# Altium PCB racer.PcbDoc (part 1 of 2)
Units mm, origin at the board's own origin, x right, y up, seen from the top; angles counter-clockwise.
Board outline 64 x 85 mm, 4 copper layers (Top Layer, Ground Plane, Power Plane, Bottom Layer), stack 0.844 mm thick; 123 components, 70 nets, 323 pads, 48 vias.
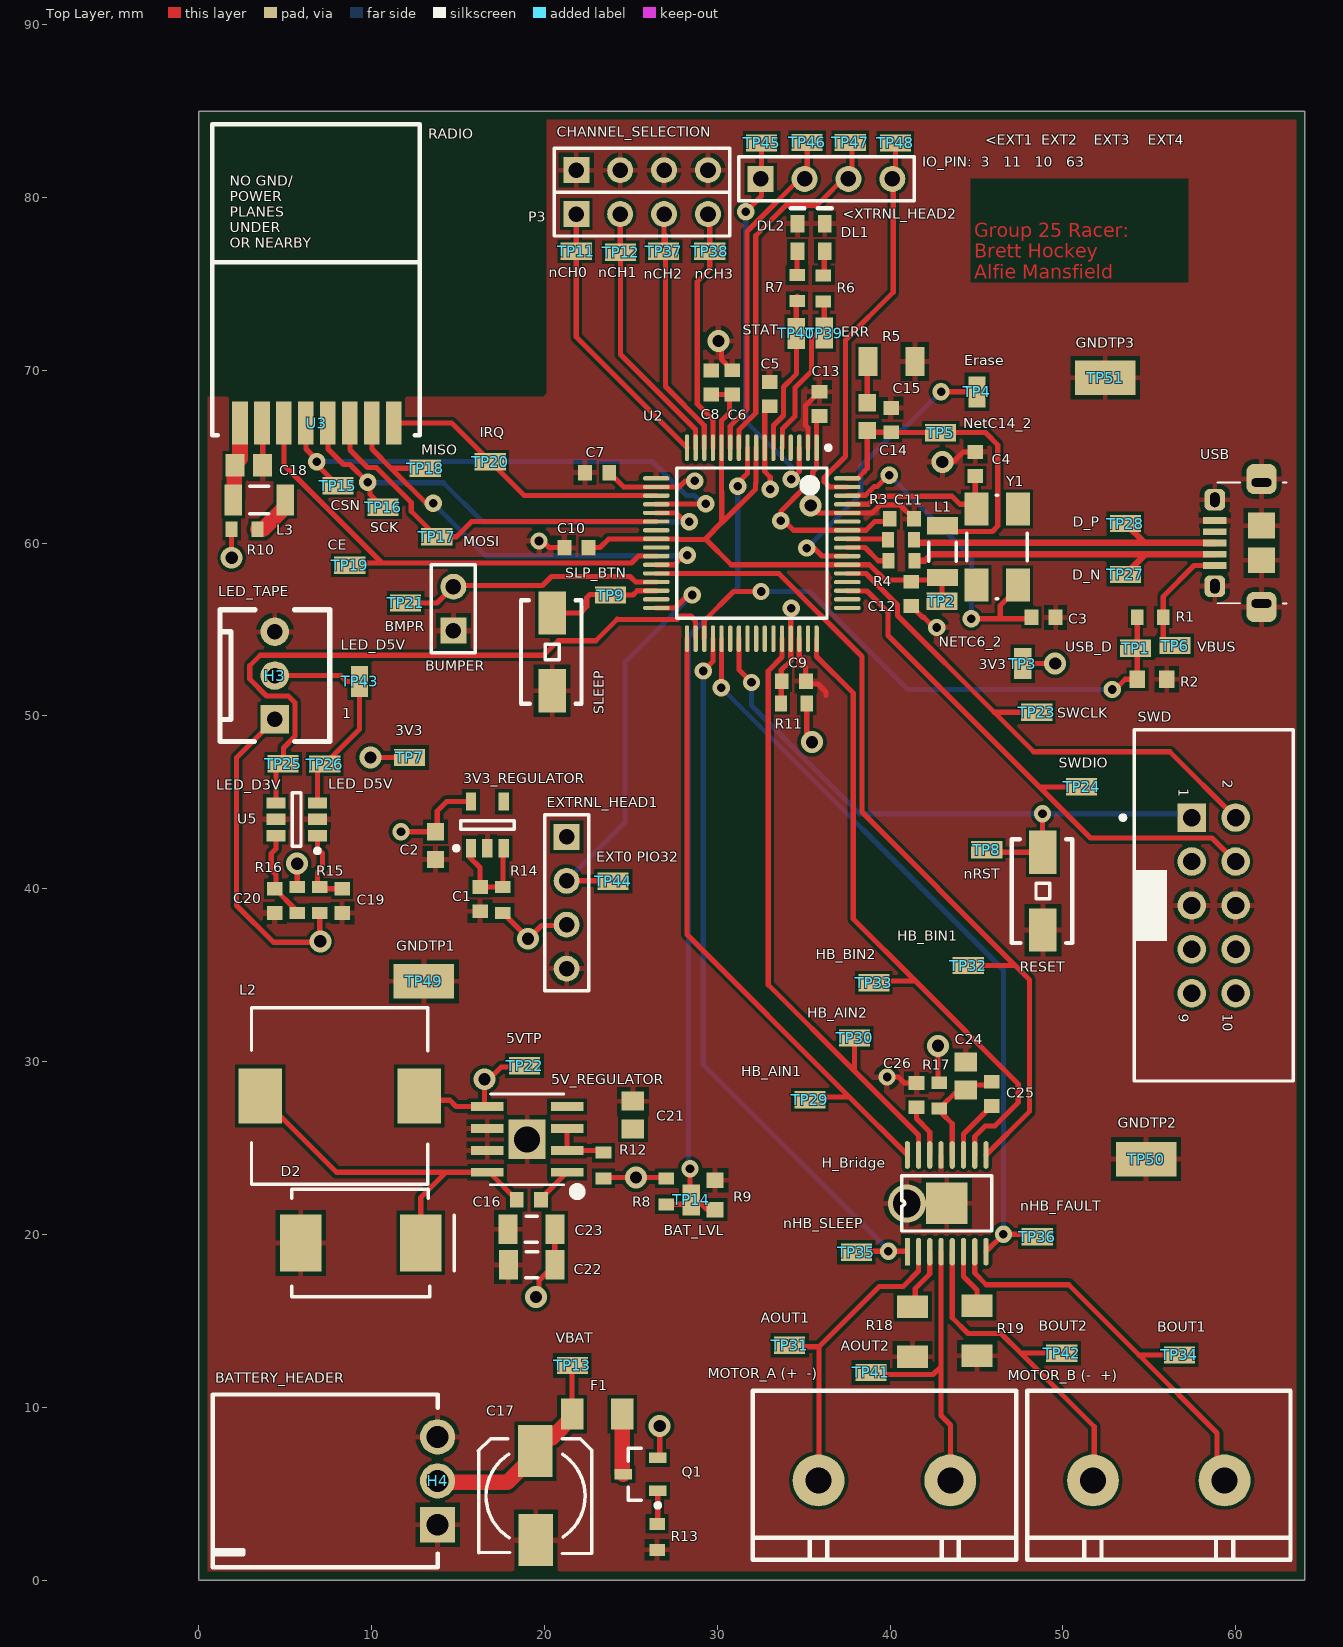
[diagram p0: Top Layer view]
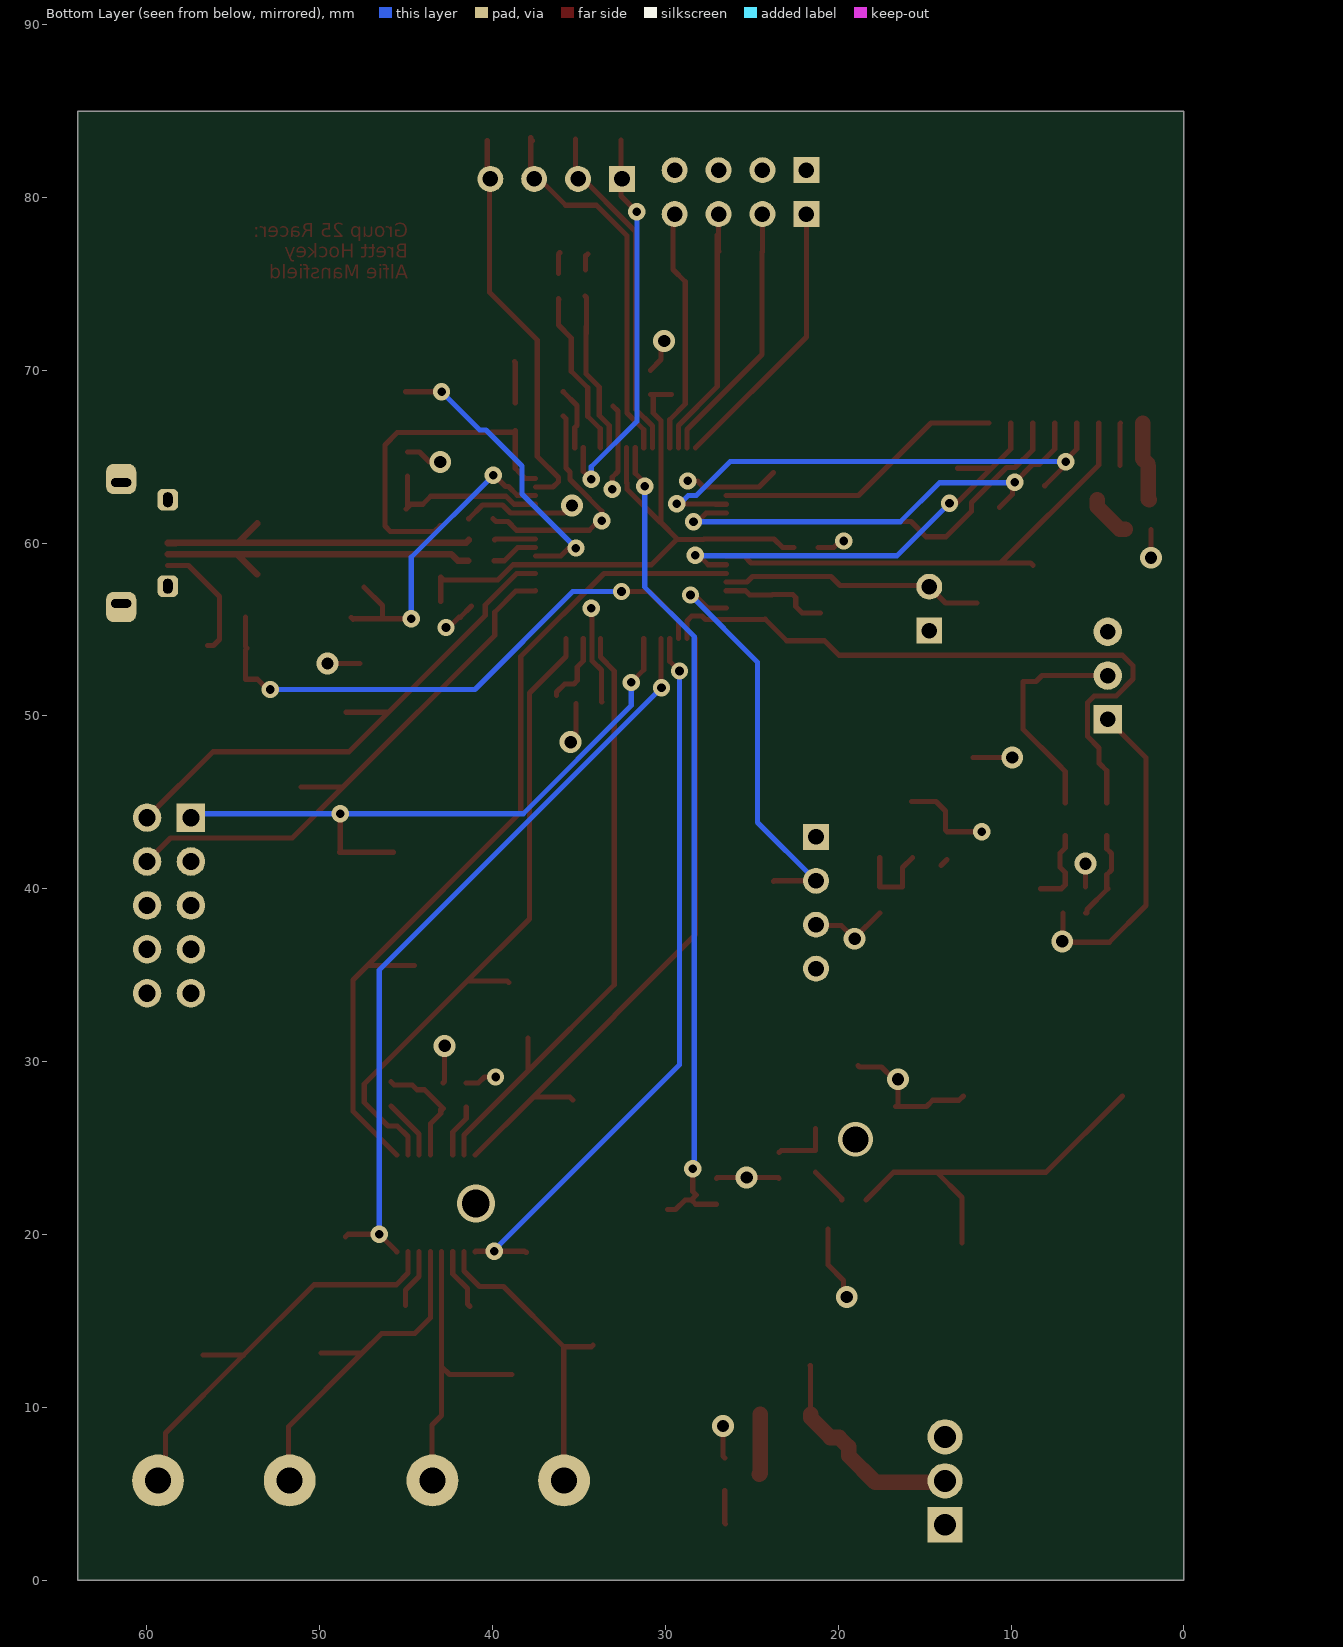
[diagram p1: Bottom Layer view, seen from below]
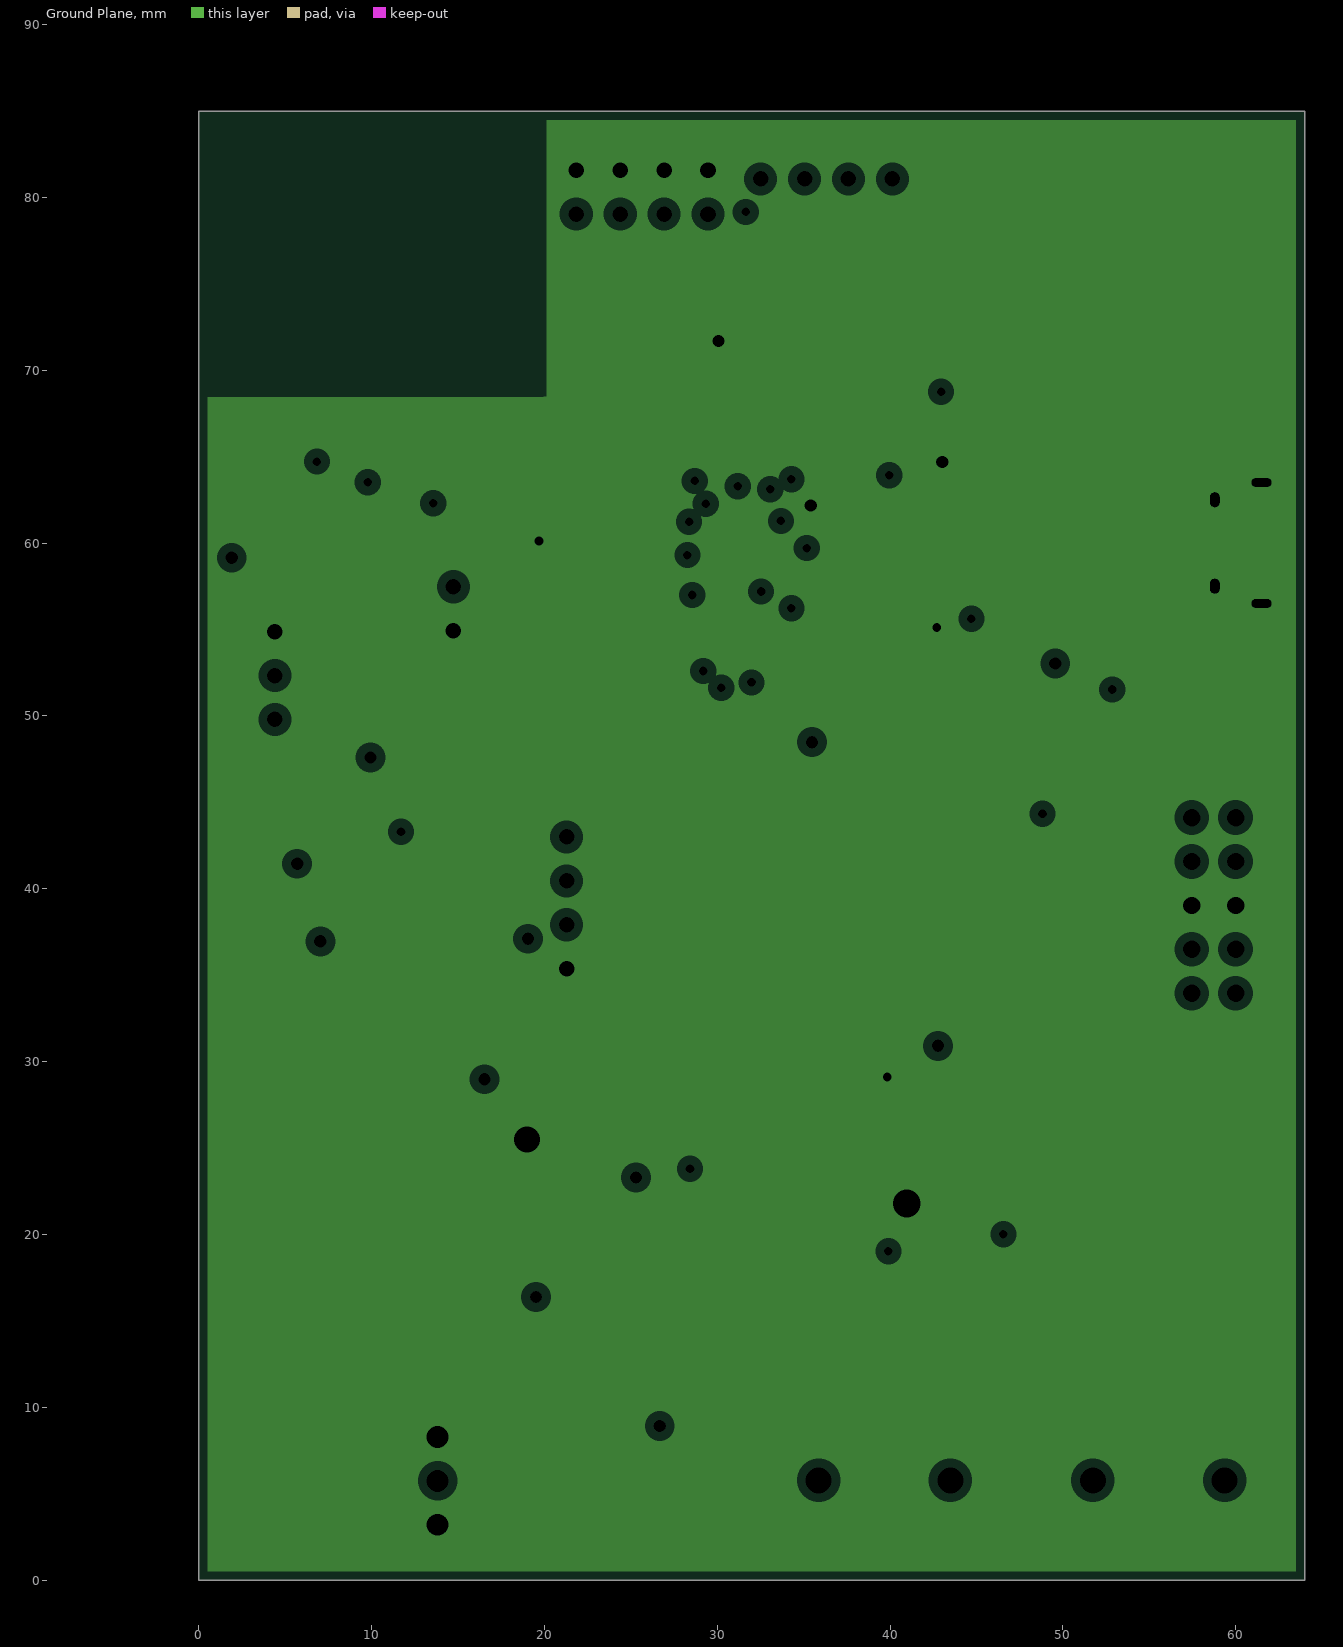
[diagram p2: Ground Plane, clearances drawn from the general rule]
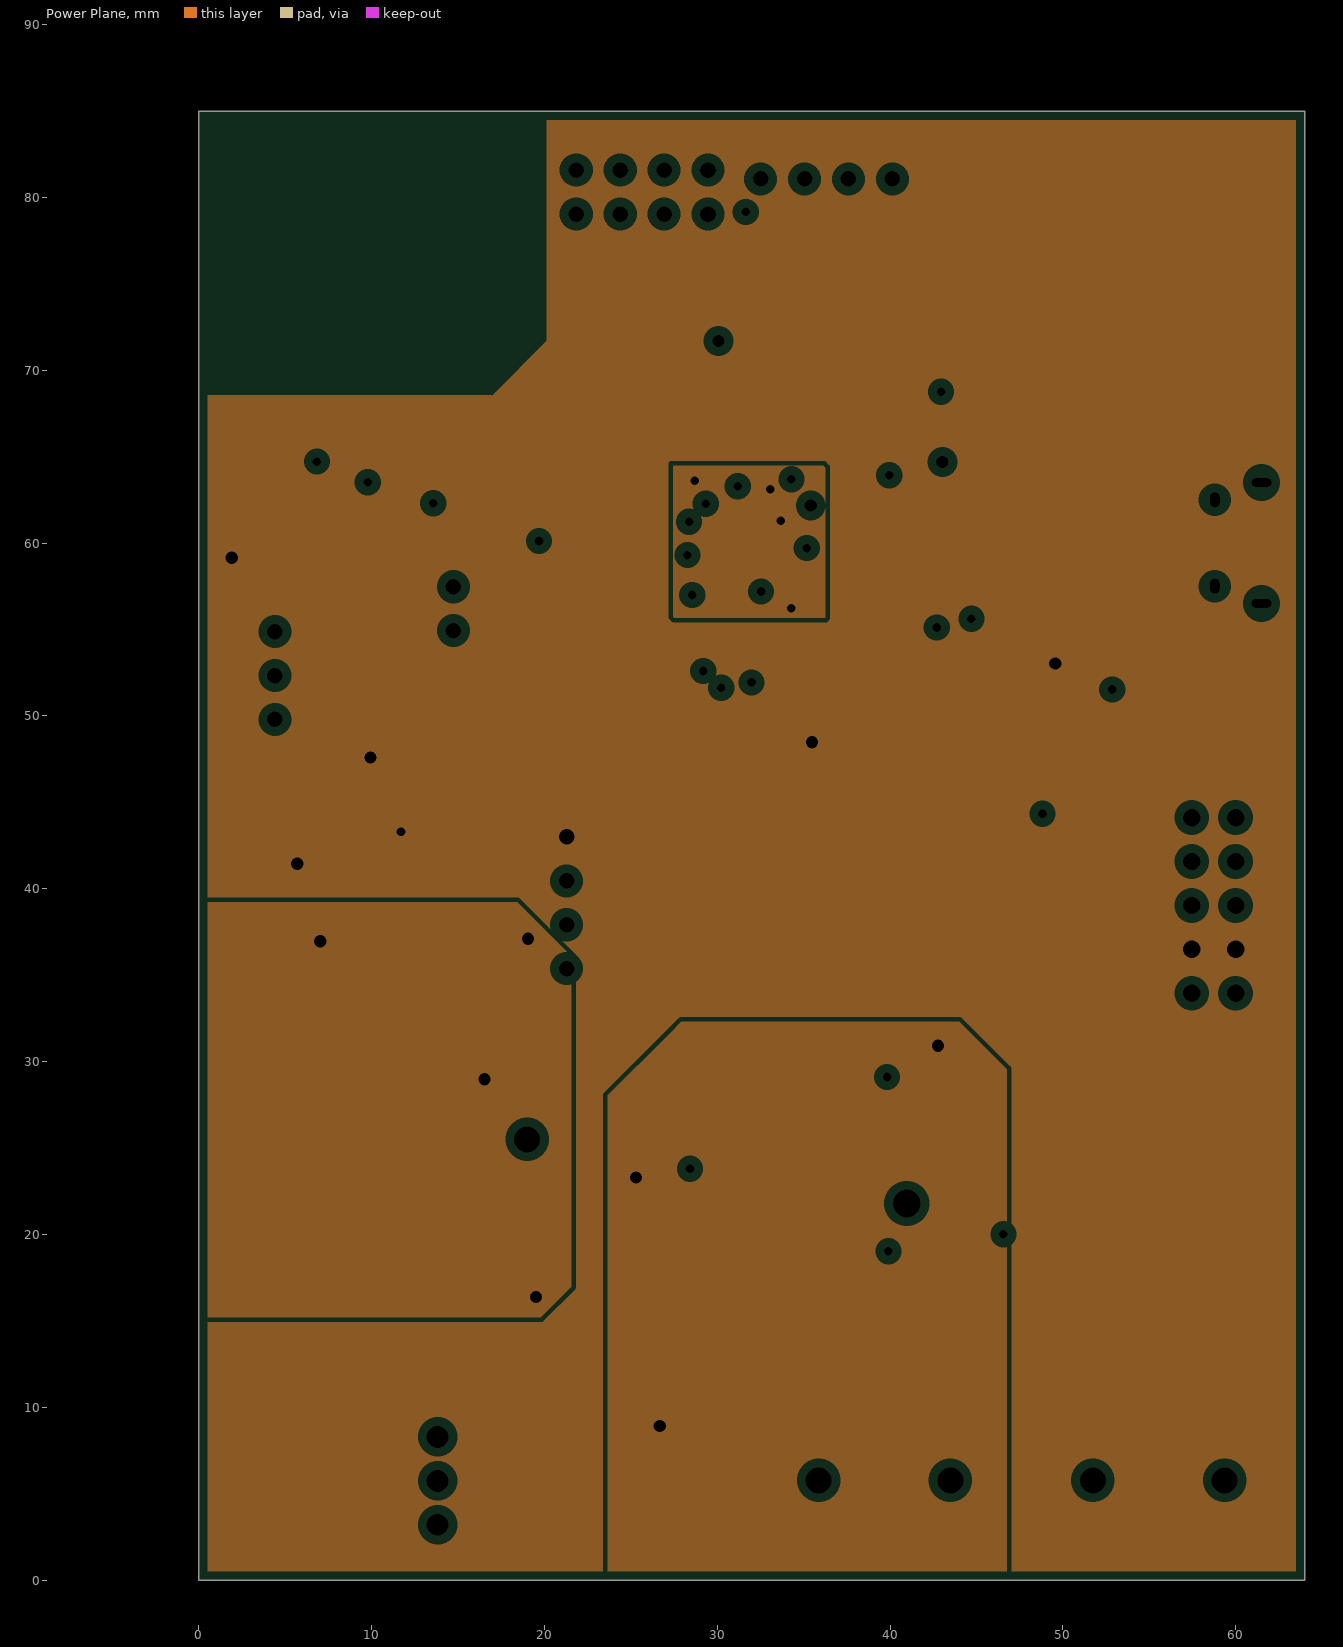
[diagram p3: Power Plane, clearances drawn from the general rule]

## Layer stack, top to bottom
Top Solder: solder mask 0.0102, Solder Resist, Dk 3.5
Top Layer: signal copper 0.0356
Dielectric 1: core 0.32, FR-4, Dk 4.8
Ground Plane: plane copper 0.036, net GND
Dielectric 3: prepreg 0.127, Dk 4.2
Power Plane: plane copper 0.036, net (Multiple Nets)
Dielectric 4: core 0.254, Dk 4.2
Bottom Layer: signal copper 0.0356
Bottom Solder: solder mask 0.0102, Solder Resist, Dk 3.5

## Board outline
0,85 64,85 64,0 0,0 0,85

## Design rules (kind name [scope] priority, off if disabled: settings)
BoardOutlineClearance [All] p1: gap=0.5 ignorepadtopadclearanceinfootprint=FALSE
Clearance GND_POLY [InNamedPolygon('GND')] p1: gap=0.254 ignorepadtopadclearanceinfootprint=FALSE
Clearance Min_Clearance_Circuit_Labs [All] p2: gap=0.2 ignorepadtopadclearanceinfootprint=FALSE
DiffPairsRouting [All] p1: maxlimit=0.254 minlimit=0.254 mostfreqgap=0.254 toplayer_minwidth=0.381 toplayer_maxwidth=0.381 toplayer_prefwidth=0.381 bottomlayer_minwidth=0.381 bottomlayer_maxwidth=0.381 bottomlayer_prefwidth=0.381 maxuncoupledlength=12.7
FanoutControl Fanout_BGA [IsBGA] p1 off: bgadir=Out bgaviamode=Centered fanoutstyle=Auto fanoutdirection=Alternating viagrid=0.025 // Fanout_BGA (Default Rule)
Height [All] p1: minheight=0 maxheight=50.8 prefheight=12.7
HoleSize [All] p1: absolutevalues=TRUE maxlimit=10 minlimit=0.3 maxpercent=80.000 minpercent=20.000
MinimumAnnularRing [All] p1: minimumring=0.1
MinimumSolderMaskSliver [All] p1: minsoldermaskwidth=0.102
NetAntennae [All] p1: netantennaetolerance=1
PlaneClearance [All] p1: clearance=0.508
PlaneConnect [All] p1: planeconnectstyle=Relief reliefexpansion=0.508 reliefentries=4 reliefconductorwidth=0.254 reliefairgap=0.254
PolygonConnect [All] p1: connectstyle=Relief reliefconductorwidth=0.305 reliefentries=4 polygonreliefangle="90 Angle" airgapwidth=0.254
RoutingVias [All] p1: holewidth=0.5 width=1 viastyle="Through Hole" minholewidth=0.3 minwidth=0.8 maxholewidth=1 maxwidth=2
SMDNeckDown [All] p1 off: percent=50.000
SMDToCorner [All] p1: distance=98425
SMDToPlane [All] p1: distance=1968504
SilkToSolderMaskClearance SilkscreenOverComponentPads [IsPad] p1: minsilkscreentomaskgap=0.2 clearancetoexposedcopper=TRUE
SolderMaskExpansion [All] p1: expansion=0.102
ViasUnderSMD [All] p1: allowed=FALSE
Width [All] p1: maxlimit=2 minlimit=0.2 preferedwidth=0.3
21 further rules are at their usual default settings.

## Classes and differential pairs
differential pair D: +D_P -D_N

## Components (designator, comment, footprint, x,y, rotation, side; value= is the part's Value field where it differs from the comment)
3V3_REGULATOR "CAT6219-330TDGT3" SOT95P280X145-5N 16.7,43.7 r90 top (schematic designator U1)
5V_REGULATOR "ADP2302ARDZ-5.0 BUCK" RD_8_1 19,25.5 r180 top locked value=Value (schematic designator U4)
<XTRNL_HEAD2 "JA_PIN_Header 4" HDR1X4 32.512,81.077 r0 top (schematic designator P5)
BUMPER "JA_PIN_Header 2" HDR1X2 14.732,54.94 r90 top (schematic designator P1)
C1 "1uF" CAPC1608L 16.275,39.4 r90 top
C2 "4.7uF" CAPC1608N 13.7,42.5 r90 top
C3 "27pF" CAPC1608L 48.881,55.702 r180 top
C4 "27pF" CAPC1608L 44.933,64.581 r270 top
C5 "100nF" CAPC1608L 33.028,68.628 r270 top
C6 "100nF" CAPC1608L 30.867,69.305 r270 top
C7 "100nF" CAPC1608L 23.052,64.084 r0 top
C8 "100nF" CAPC1608L 29.647,69.294 r270 top
C9 "100nF" CAPC1608L 34.428,52.019 r180 top
C10 "100nF" CAPC1608L 21.858,59.741 r0 top
C11 "100nF" CAPC1608L 40.677,61.417 r180 top
C12 "100nF" CAPC1608L 41.224,57.063 r90 top
C13 "100nF" CAPC1608L 35.916,68.061 r270 top
C14 "4.7uF" CAPC1608N 38.684,67.323 r270 top
C15 "100nF" CAPC1608L 40.056,67.121 r90 top
C16 "100nF" CAPC1608L 19.1,22 r0 top
C17 "100uF/16V" NICH-1 19.482,4.877 r90 top
C18 "10uF" CAPC2012L 2.9,64.5 r180 top
C19 "100nF" CAPC1608L 8.3,39.3 r90 top
C20 "100nF" CAPC1608L 4.4,39.3 r90 top
C21 "10uF" CAPC2012L 25.121,26.911 r270 top
C22 "22uF" CAPC3216L 19.257,18.237 r0 top
C23 "22uF" CAPC3216L 19.25,20.3 r0 top
C24 "10uF" CAPC2012L 44.374,29.172 r270 top
C25 "16V (minimum)" CAPC1608L 45.872,28.132 r90 top value=10nF
C26 "2.2uF" CAPC1608L 41.529,28.056 r90 top
CHANNEL_SELECTION "JA_PIN_Header 4" HDR1X4 21.844,81.585 r0 top (schematic designator P2)
D2 "MBRS330T3G 30V 4A" SMC 9.368,19.507 r0 top
DL1 "Red" WL-SMCW0603 36.22,78.486 r270 top
DL2 "Green" WL-SMCW0603 34.646,78.486 r270 top
EXTRNL_HEAD1 "JA_PIN_Header 4" HDR1X4 21.285,43.002 r270 top (schematic designator P4)
F1 "2A" RESC3216N 23.05,9.6 r0 top
H3 "LED_TAPE" MOLEX_KK_3_HDR 4.4,49.8 r90 top value="3 Pin Molex KK Hdr"
H4 "BATTERY_HEADER" BATT_HEADER_3POS 13.818,5.74 r90 top
H_Bridge "DRV8833" "HTSOP16 DRV8833" 41,19 r90 top locked (schematic designator U6)
L1 "1A max, Idc 0.3R," INDC3216L 43.028,59.511 r270 top
L2 "IND 5.2UH 6A" INDUCTOR5u2 8.151,28.016 r0 top
L3 "1A max, Idc 0.3R," INDC3216L 3.5,62.5 r0 top
"MOTOR_A (+  -)" "TERM_BLK_2POS" TERM_BLK_2POS 43.485,5.766 r180 top (schematic designator H8)
"MOTOR_B (-  +)" "TERM_BLK_2POS" TERM_BLK_2POS 59.36,5.766 r180 top (schematic designator H9)
P3 "JA_PIN_Header 4" HDR1X4 21.844,79.045 r0 top
Q1 "SSM3J328R,LF" SOT23_L 25.562,6.121 r180 top
R1 "27K" RESC1608L 55.055,55.723 r0 top
R2 "47K" RESC1608N 55.155,52.123 r180 top
R3 "27R" RESC1608L 40.628,60.198 r180 top
R4 "27R" RESC1608L 40.653,58.979 r180 top
R5 "1R" RESC3216L 40.085,70.51 r180 top
R6 "3K" RESC1608L 36.144,74.74 r90 top
R7 "2K" RESC1608L 34.62,74.764 r90 top
R8 "62K" RESC1608L 27.051,22.492 r90 top
R9 "47K" RESC1608N 29.87,22.288 r270 top
R10 "0R" RESC1608L 2.65,60.8 r180 top
R11 "0R" RESC1608L 34.429,50.724 r0 top
R12 "0R" RESC1608L 23.419,23.99 r90 top
R13 "1K" RESC1608L 26.518,2.501 r90 top
R14 "0R" RESC1608L 17.6,39.35 r90 top
R15 "0R" RESC1608L 7,39.35 r90 top
R16 "0R" RESC1608L 5.7,39.35 r90 top
R17 "0R" RESC1608L 42.85,28.03 r90 top
R18 "25mR" RESC3216N 41.3,14.374 r270 top
R19 "25mR" RESC3216N 45.034,14.429 r270 top
RESET "EVQPNF05M" EVQPNF05M 48.844,39.863 r90 top (schematic designator S2)
SLEEP "EVQPNF05M" EVQPNF05M 20.447,53.706 r90 top (schematic designator S1)
SWD "Header 5X2 Vert" IDC2.54-V10D 58.725,39.04 r270 top (schematic designator H2)
TP1 "USB_D" TP_0603 54.205,53.923 r180 top value=TP
TP2 "NETC6_2" TP_0603 43.002,56.642 r0 top value=TP
TP3 "3V3" TP_0603 47.675,53.035 r270 top value=TP
TP4 "Erase" TP_0603 45.034,68.758 r270 top value=TP
TP5 "NetC14_2" TP_0603 42.926,66.396 r0 top value=TP
TP6 "VBUS" TP_0603 56.49,54.077 r0 top value=TP
TP7 "3V3" TP_0603 12.2,47.6 r0 top value=TP
TP8 "nRST" TP_0603 45.593,42.266 r0 top value=TP
TP9 "SLP_BTN" TP_0603 23.825,56.998 r0 top value=TP
TP11 "nCH0" TP_0603 21.844,76.886 r180 top value=TP
TP12 "nCH1" TP_0603 24.409,76.835 r0 top value=TP
TP13 "VBAT" TP_0603 21.615,12.421 r180 top value=TP
TP14 "BAT_LVL" TP_0603 28.499,21.996 r270 top value=TP
TP15 "CSN" TP_0603 8.052,63.322 r180 top value=TP
TP16 "SCK" TP_0603 10.668,62.078 r180 top value=TP
TP17 "MOSI" TP_0603 13.768,60.376 r180 top value=TP
TP18 "MISO" TP_0603 13.106,64.338 r180 top value=TP
TP19 "CE" TP_0603 8.738,58.725 r180 top value=TP
TP20 "IRQ" TP_0603 16.866,64.719 r180 top value=TP
TP21 "BMPR" TP_0603 11.963,56.54 r0 top value=TP
TP22 "5VTP" TP_0603 18.847,29.769 r180 top value=TP
TP23 "SWCLK" TP_0603 48.489,50.216 r180 top value=TP
TP24 "SWDIO" TP_0603 51.079,45.898 r180 top value=TP
TP25 "LED_D3V" TP_0603 4.877,47.244 r180 top value=TP
TP26 "LED_D5V" TP_0603 7.29,47.219 r180 top value=TP
TP27 "D_N" TP_0603 53.619,58.191 r180 top value=TP
TP28 "D_P" TP_0603 53.619,61.138 r180 top value=TP
TP29 "HB_AIN1" TP_0603 35.357,27.788 r180 top value=TP
TP30 "HB_AIN2" TP_0603 37.948,31.369 r180 top value=TP
TP31 "AOUT1" TP_0603 34.188,13.589 r0 top value=TP
TP32 "HB_BIN1" TP_0603 44.526,35.56 r0 top value=TP
TP33 "HB_BIN2" TP_0603 39.065,34.569 r0 top value=TP
TP34 "BOUT1" TP_0603 56.744,13.03 r180 top value=TP
TP35 "nHB_SLEEP" TP_0603 38.049,18.974 r180 top value=TP
TP36 "nHB_FAULT" TP_0603 48.514,19.863 r180 top value=TP
TP37 "nCH2" TP_0603 26.899,76.886 r0 top value=TP
TP38 "nCH3" TP_0603 29.566,76.886 r0 top value=TP
TP39 "ERR" TP_0603 36.195,72.161 r270 top value=TP
TP40 "STAT" TP_0603 34.569,72.136 r270 top value=TP
TP41 "AOUT2" TP_0603 38.887,12.014 r0 top value=TP
TP42 "BOUT2" TP_0603 49.936,13.132 r180 top value=TP
TP43 "LED_D5V" TP_0603 9.3,52 r90 top value=TP
TP44 "EXT0 PIO32" TP_0603 23.978,40.437 r180 top value=TP
TP45 "<EXT1" TP_0603 32.563,83.16 r0 top value=TP
TP46 "EXT2" TP_0603 35.204,83.185 r0 top value=TP
TP47 "EXT3" TP_0603 37.694,83.185 r180 top value=TP
TP48 "EXT4" TP_0603 40.31,83.16 r180 top value=TP
TP49 "GNDTP1" TP_1206 13.03,34.646 r180 top value=TP
TP50 "GNDTP2" TP_1206 54.813,24.359 r180 top value=TP
TP51 "GNDTP3" TP_1206 52.451,69.571 r0 top value=TP
U2 "ATSAM4S8BA-ANR" LQFP64_L 32,60 r270 top locked
U3 "RADIO" NRF24 0.786,66.25 r0 top
U5 "SN74LVC1T45" SOT23-6_N 5.664,44.018 r180 top
USB "JS_USB_MICRO_B" FCI_USB_10118194-0001LF 62.943,60.011 r90 top (schematic designator H1)
Y1 "12MHz" 6.0X3.5-4 46.196,59.776 r270 top

## Footprints (in the part's own frame and the unit in brackets; to place one, negate y for a bottom-side part, rotate by r counter-clockwise, add the part's x,y. Pads: shape width x height; smd on the part's side, far side on the other; paste and mask are expansions set on the pad)
6.0X3.5-4 [mm] "4 SMD 6.0X3.5 mm No Lead Crystal"
  rect 1.9x1.4 smd: 1(-2.2,-1.2) 2(2.2,-1.2) 3(2.2,1.2) 4(-2.2,1.2)
  silkscreen extent -3,-1.75 3,1.75, body extent -3,-1.75 3,1.75, height 1.2
BATT_HEADER_3POS [mil]
  rect 80x80 hole 50: 1(-100,0)
  round 80 hole 50: 2(0,0) 3(100,0)
  silkscreen extent -197,0 197,512, body extent -197,-31 200,504, height 294
CAPC1608L [mm] "Chip Capacitor, Body 1.6x0.8mm, IPC High Density"
  rect 0.8x0.9 smd: 1(-0.7,0) 2(0.7,0)
  body extent -0.87,-0.48 0.87,0.48, height 0.85
CAPC1608N [mm] "Chip Capacitor, Body 1.6x0.8mm, IPC Medium Density"
  rect 1x1 smd: 1(-0.8,0) 2(0.8,0)
  body extent -0.87,-0.48 0.87,0.48, height 0.85
CAPC2012L [mm] "Chip Capacitor, Body 2.0x1.3mm, IPC High Density"
  rect 1.1x1.3 smd: 1(-0.8,0) 2(0.8,0)
  body extent -1.1,-0.72 1.1,0.72, height 1.1
CAPC3216L [mm] "Chip Capacitor, Body 3.2x1.6mm, IPC High Density"
  rect 1.1x1.7 smd: 1(-1.35,0) 2(1.35,0)
  silkscreen extent -0.35,-0.75 0.35,0.75, body extent -1.7,-0.9 1.7,0.9, height 1.35
EVQPNF05M [mm] "Panansonic light touch SMD push button switch"
  rect 2.5x1.6 smd: 1(-2.25,0) 2(2.25,0)
  silkscreen extent -3,-1.7 3,1.8, body extent -3,-1.7 3,1.8, height 5
FCI_USB_10118194-0001LF [mm] "Micro USB B Type Receptacle"
  rect 0.4x1.35 smd mask+0.07: 1(-1.3,4.15) 2(-0.65,4.15) 3(0,4.15) 4(0.65,4.15) 5(1.3,4.15)
  rrect50% 1.75x1.75 hole 0.5 slot 1.15 at 90 deg copper offset -0.2,0 paste+0 mask+0.1: 6(-3.5,1.45)
  rrect50% 1.25x1.2 hole 0.55 slot 0.85 at 0 deg: 6(-2.5,4.15) 6(2.5,4.15)
  rect 1.5x1.55 smd: 6(-1,1.45) 6(1,1.45)
  rrect50% 1.75x1.75 hole 0.5 slot 1.15 at 90 deg copper offset 0.2,0 paste+0 mask+0.1: 6(3.5,1.45)
  silkscreen extent -3.5,0 3.5,4
HDR1X2 [mm] "Connector; Header; 2 Position"
  rect 1.5x1.5 hole 0.9: 1(0,0)
  round 1.5 hole 0.9: 2(2.54,0)
  silkscreen extent -1.27,-1.27 3.81,1.27, body extent -1.25,-1.25 3.79,1.25, height 8.54
HDR1X4 [mm] "Connector; Header; 4 Position"
  rect 1.5x1.5 hole 0.9: 1(0,0)
  round 1.5 hole 0.9: 2(2.54,0) 3(5.08,0) 4(7.62,0)
  silkscreen extent -1.27,-1.27 8.89,1.27, body extent -1.26,-1.3 8.86,1.2, height 2.1
"HTSOP16 DRV8833" [mm]
  rect 1.6x0.3 smd: 1(0,0)
  oval 1.6x0.3 smd: 2(0,-0.65) 3(0,-1.3) 4(0,-1.95) 5(0,-2.6) 6(0,-3.25) 7(0,-3.9) 8(0,-4.55) 9(5.6,-4.55) 10(5.6,-3.9) 11(5.6,-3.25) 12(5.6,-2.6) 13(5.6,-1.95) 14(5.6,-1.3) 15(5.6,-0.65) 16(5.6,0)
  rect 2.4x2.4 smd: 17(2.8,-2.275)
  silkscreen extent 1.2,-4.88 4.4,0.33, body extent -0.4,-4.77 6,0.23, height 1.13
IDC2.54-V10D [mm] "Connector; IDC, Low Profile Male Header, Thru-Hole; 10 Position; Vertical; Pitch 2.54 mm; Body 20.32 x 9.2 x 9.45 mm (LxWxH)"
  rect 1.65x1.65 hole 1: 1(-5.08,-1.27)
  round 1.65 hole 1: 2(-5.08,1.27) 3(-2.54,-1.27) 4(-2.54,1.27) 5(0,-1.27) 6(0,1.27) 7(2.54,-1.27) 8(2.54,1.27) 9(5.08,-1.27) 10(5.08,1.27)
  silkscreen extent -10.16,-5.37 10.16,4.6, body extent -10.16,-4.6 10.16,4.6, height 9.45
INDC3216L [mm] "Chip Inductor, Body 3.2x1.6mm, IPC High Density"
  rect 1x1.8 smd: 1(-1.5,0) 2(1.5,0)
  silkscreen extent -0.55,-0.8 0.55,0.8, body extent -1.75,-0.95 1.75,0.95, height 1.9
INDUCTOR5u2 [mm]
  rect 2.5x3.2 smd: 1(-4.6,0) 2(4.6,0)
  silkscreen extent -5.1,-5.1 5.1,5.1, body extent -5,-5 5,5, height 3.8
LQFP64_L [mm] "Thin QFP, 64-Leads, Body 10x10mm, Pitch 0.5mm, IPC High Density"
  oval 1.55x0.25 smd mask+0.07: 1(-5.525,3.75) 2(-5.525,3.25) 3(-5.525,2.75) 4(-5.525,2.25) 5(-5.525,1.75) 6(-5.525,1.25) 7(-5.525,0.75) 8(-5.525,0.25) 9(-5.525,-0.25) 10(-5.525,-0.75) 11(-5.525,-1.25) 12(-5.525,-1.75) 13(-5.525,-2.25) 14(-5.525,-2.75) 15(-5.525,-3.25) 16(-5.525,-3.75) 33(5.525,-3.75) 34(5.525,-3.25) 35(5.525,-2.75) 36(5.525,-2.25) 37(5.525,-1.75) 38(5.525,-1.25) 39(5.525,-0.75) 40(5.525,-0.25) 41(5.525,0.25) 42(5.525,0.75) 43(5.525,1.25) 44(5.525,1.75) 45(5.525,2.25) 46(5.525,2.75) 47(5.525,3.25) 48(5.525,3.75)
  oval 0.25x1.55 smd mask+0.07: 17(-3.75,-5.525) 18(-3.25,-5.525) 19(-2.75,-5.525) 20(-2.25,-5.525) 21(-1.75,-5.525) 22(-1.25,-5.525) 23(-0.75,-5.525) 24(-0.25,-5.525) 25(0.25,-5.525) 26(0.75,-5.525) 27(1.25,-5.525) 28(1.75,-5.525) 29(2.25,-5.525) 30(2.75,-5.525) 31(3.25,-5.525) 32(3.75,-5.525) 49(3.75,5.525) 50(3.25,5.525) 51(2.75,5.525) 52(2.25,5.525) 53(1.75,5.525) 54(1.25,5.525) 55(0.75,5.525) 56(0.25,5.525) 57(-0.25,5.525) 58(-0.75,5.525) 59(-1.25,5.525) 60(-1.75,5.525) 61(-2.25,5.525) 62(-2.75,5.525) 63(-3.25,5.525) 64(-3.75,5.525)
  silkscreen extent -5.65,-4.35 4.35,4.55, body extent -5,-5 5,5, height 1.6
MOLEX_KK_3_HDR [mil] "MOLEX_KK_3_HDR"
  rect 65x65 hole 35.43: 1(0,0)
  round 65 hole 35.43: 2(100,0) 3(200,0)
  silkscreen extent -50,-125 250,125, body extent -50,-114 250,114, height 461
NICH-1 [mm] "Electrolytic capacitor"
  rect 3x2 smd: 1(-2.561,-0.022) 2(2.584,0.011)
  silkscreen extent -3.34,-3.25 3.3,3.3, body extent -3.2,-3.2 3.2,3.2, height 5.3
NRF24 [mm]
  rect 0.9x2.5 smd: 1(1.6,0.7) 2(2.871,0.7) 3(4.143,0.7) 4(5.414,0.7) 5(6.686,0.7) 6(7.957,0.7) 7(9.229,0.7) 8(10.5,0.7)
  silkscreen extent 0,0 12,18, body extent 0,0 12,18, height 2.27
RD_8_1 [mil]
  rect 74x20 smd paste+0 mask+0: 1(-91,75) 2(-91,25) 3(-91,-25) 4(-91,-75) 5(91,-75) 6(91,-25) 7(91,25) 8(91,75)
  rect 84.65x90 smd paste-44.5 mask+0: EPAD(0,0)
  silkscreen extent -118,-104 84,123, body extent 0,0 10,10, height 10
RESC1608L [mm] "Chip Resistor, Body 1.6x0.8mm, IPC High Density"
  rect 0.7x0.9 smd: 1(-0.75,0) 2(0.75,0)
  body extent -0.85,-0.48 0.85,0.48, height 0.9
RESC1608N [mm] "Chip Resistor, Body 1.6x0.8mm, IPC Medium Density"
  rect 0.9x1 smd: 1(-0.85,0) 2(0.85,0)
  body extent -0.85,-0.48 0.85,0.48, height 0.6
RESC3216L [mm] "Chip Resistor, Body 3.1x1.6mm, IPC High Density"
  rect 1.1x1.7 smd: 1(-1.35,0) 2(1.35,0)
  body extent -1.68,-0.87 1.68,0.87, height 2.54
RESC3216N [mm] "Chip Resistor, Body 3.2x1.6mm, IPC Medium Density"
  rect 1.3x1.8 smd: 1(-1.45,0) 2(1.45,0)
  body extent -1.68,-0.87 1.68,0.87, height 0.71
SMC [mm] "DO-214-AB/SMC; 2 C-Bend Leads; Body 7.9 x 5.9 mm, inc. leads (LxW)"
  rect 2.4x3.3 smd: 1(-3.475,0) 2(3.475,0)
  silkscreen extent -4,-3.1 5.43,3.1, body extent -4.22,-2.95 3.72,2.95, height 2.27
SOT23-6_N [mm]
  rect 1.1x0.65 smd: 1(-1.2,0.95) 2(-1.2,0) 3(-1.2,-0.95) 4(1.2,-0.95) 5(1.2,0) 6(1.2,0.95)
  silkscreen extent -1.33,-1.55 0.25,1.95, body extent -0.9,-1.55 0.9,1.55, height 1.45
SOT23_L [mm] "SOT23, 3-Leads, Body 2.9x1.3mm, Pitch 0.95mm, Lead Span 2.3mm, IPC High Density"
  rect 1x0.6 smd: 1(-1,0.95) 2(-1,-0.95) 3(1,0)
  silkscreen extent -1.13,-1.5 0.7,1.92, body extent -0.7,-1.5 0.7,1.5, height 1.1
SOT95P280X145-5N [mm] "SOT23, 5-Leads, Body 2.90x2.80mm, Pitch 0.95mm, IPC Medium Density"
  rect 1.05x0.6 smd: 1(-1.35,0.95) 2(-1.35,0) 3(-1.35,-0.95) 4(1.35,-0.95) 5(1.35,0.95)
  silkscreen extent -1.47,-1.55 0.25,1.92, body extent -0.87,-1.52 0.87,1.53, height 1.45
TERM_BLK_2POS [mm]
  round 3 hole 1.5: 1(0,0) 2(7.62,0)
  silkscreen extent -3.81,-5.2 11.43,4.6
TP_0603 [mm] "TestPoint 0603"
  rect 1.8x1 smd: 1(0,0)
  body extent -1,-0.6 1,0.6, height 0.9
TP_1206 [mm] "Test Point Pad"
  rect 3.5x2 smd: 1(0,0)
  body extent -1.62,-0.85 1.63,0.8, height 2
WL-SMCW0603 [mm] "2.4 x 0.8 x 0.7mm LED"
  rect 1x0.8 smd: 1(0,0) 2(1.6,0)
  silkscreen extent -0.9,-0.4 -0.9,0.4

## Part data
3V3_REGULATOR: library part SV_CAT6219-330TDGT3, "IC REG LIN 3.3V 500MA TSOT23-5", Base Part Number=CAT6219, Current - Output=500mA, Package / Case="SOT-23-5 Thin, TSOT-23-5", Supplier Device Package=TSOT-23-5, Supplier Part Number=CAT6219-330TDGT3CT-ND, Voltage - Input (Max)=5.5V, Voltage - Output (Min/Fixed)=3.3V, Voltage Dropout (Max)="0.5V @ 500mA", ComponentLink1Description=http://www.onsemi.com/pub/Collateral/CAT6219-D.PDF, ComponentLink1URL=http://www.onsemi.com/pub/Collateral/CAT6219-D.PDF, Manufacturer Part Number=CAT6219-330TDGT3, Supplier=Digi-Key, Supplier 1=Digi-Key
5V_REGULATOR: library part ADP2302ARDZ-5.0-R7, "IC REG BUCK 5V 2A 8SOIC", Current - Output=2A, Frequency - Switching=700kHz, Supplier Part Number 1=ADP2302ARDZ-5.0-R7CT-ND, Voltage - Input (Max)=20V, Voltage - Output (Min/Fixed)=5V, Manufacturer_Part_Number=ADP2302ARDZ-5.0-R7, Output Type=Fixed, Supplier 1=Digi-Key, Type=DEV, Vendor="Analog Devices Inc"
<XTRNL_HEAD2 CHANNEL_SELECTION EXTRNL_HEAD1 P3: "Header, 4-Pin", LatestRevisionDate=17-Jul-2002, LatestRevisionNote="Re-released for DXP Platform.", Publisher="Altium Limited"
BUMPER: "Header, 2-Pin", LatestRevisionDate=17-Jul-2002, LatestRevisionNote="Re-released for DXP Platform.", Publisher="Altium Limited"
C1: library part CC_1uF_0603, "CAP CER 1uF Y5V -20% +80% 16V 0603", Max Voltage=16V, Code_IPC="1608 [0603]", PackageReference=0603, Storage Location="PCB Assembly WS", Supplier="ECE Dept"
C2 C14: library part CC_4.7uF_0603, "CAP CER 4.7uF X5R +-20%  10V 0603", Max Voltage=10V, Code_IPC=2012[0805], Note="Footprint corresponds to dimensions for bulk cassette packaging. This case size has tightened tolerances.", PackageReference=0805, Storage Location="PCB Assembly WS", Supplier="ECE Dept"
C3 C4: library part CC_27pF_0603, "CAP CER 27pF NPO/COG +-5% 50V 0603", Code_IPC="1608 [0603]", PackageReference=0603, Storage Location="PCB Assembly WS", Supplier="ECE Dept"
C5 C6 C7 C8 C9 C10 C11 C12 C13 C15 C16 C19 C20: library part CC_100nF_0603, "CAP CER 100nF X7R +-10% 50V 0603", Code_IPC="1608 [0603]", PackageReference=0603, Storage Location="PCB Assembly WS", Supplier="ECE Dept"
C17: library part CA_100uF_16V, "CAP ALUM 100uF 16V SMD", Manufacturer=Nichcon, Manufacturer PN=UWX1C101MCL1GB, Supplier Part Number 1=1870677, Storage Location="PCB Assembly WS", Supplier="ECE Dept", Supplier 1=Farnell, Supplier 2=Digi-Key, Supplier Part Number 2=493-2105-1-ND
C18 C21 C24: library part CC_10uF_0805_16V, "CAP CER 10uF X5R 16V 0805", Manufacturer="Samsung Electro-Mechanics", Manufacturer Part Number=CL21A106KOQNNWE, Max Voltage=16V, Operating Temperature="-55°C ~ 85°C", Package / Case="0805 (2012 Metric)", Ratings=-, Supplier Part Number 1=1276-2894-1-ND, Temperature Coefficient=X5R, Tolerance=±10%, Applications="General Purpose", Category=Capacitors, Code_IPC=2012[0805], ComponentLink1Description=http://www.samsungsem.com/kr/support/product-search/mlcc/CL21A106KOQNNWE.jsp, ComponentLink1URL=http://www.samsungsem.com/kr/support/product-search/mlcc/CL21A106KOQNNWE.jsp, Features=-, Height - Seated (Max)=-, Lead Spacing=-, Lead Style=-, Mounting Type="Surface Mount, MLCC", Note="Footprint corresponds to dimensions for bulk cassette packaging. This case size has tightened tolerances.", Notification="Current market demand for these product types have resulted in fluctuating and extending lead times. Lead times may differ.", PackageReference=0805, Packaging="Cut Tape (CT)", Part Status=Active, Pricing 1="1=0.35, 10=0.25, 100=0.1178, 500=0.08254, 1000=0.06831 (NZD)", RoHS="RoHS Compliant", Size / Dimension="0.079\" L x 0.049\" W (2.00mm x 1.25mm)", Stock 1=20000, Supplier 1=Digi-Key, Thickness (Max)="0.055\" (1.40mm)", Voltage - Rated=16V
C22 C23: library part CC_22uF_1206, "CAP CER 22uF Y5V -20% +80% 10V 1206", Dielectric=Y5V, Max Voltage=10V, Storage Location="PCB Assembly WS", Supplier="ECE Dept"
C25: library part CC_10nF_0603, "CAP CER 10nF X7R +-10% 50V 0603", Code_IPC="1608 [0603]", PackageReference=0603, Storage Location="PCB Assembly WS", Supplier="ECE Dept"
C26: library part CC_2.2uF_0603, "CAP CER 2.2uF X5R +-20% 10V 0603", Max Voltage=10V, Code_IPC="1608 [0603]", PackageReference=0603, Storage Location="PCB Assembly WS", Supplier="ECE Dept"
D2: library part MBRS330T3G, "SCHOTTKY  30V 4A", Base Part Number=MBRS330, Capacitance @ Vr, F=-, Current - Average Rectified (Io)=4A, Manufacturer="ON Semiconductor", Operating Temperature - Junction="-65°C ~ 150°C", Package / Case="DO-214AB, SMC", Supplier Device Package=SMC, Supplier Part Number 1=MBRS330T3GOSCT-ND, Category="Discrete Semiconductor Products", ComponentLink1Description=http://www.onsemi.com/pub/Collateral/MBRS340T3-D.PDF, ComponentLink1URL=http://www.onsemi.com/pub/Collateral/MBRS340T3-D.PDF, Diode Type=Schottky, Manufacturer Part Number=MBRS330T3G, Mounting Type="Surface Mount", Packaging="Cut Tape (CT)", Part Status=Active, Pricing 1="1=0.93, 10=0.79, 100=0.5902, 500=0.46368, 1000=0.35829 (NZD)", RoHS="RoHS Compliant", Speed="Fast Recovery =< 500ns, > 200mA (Io)", Stock 1=8919, Supplier 1=Digi-Key
DL1: library part DL_150060RS75000, "LED Red 250mcd 0603 SMD", Forward Current If=30, Forward Voltage=2, Manufacturer="WURTH ELEKTRONIK", Manufacturer Part Number=150060RS75000, Supplier Part Number 1=2322071, LED Colour=Red, LED Mounting=SMD, Lens Shape=Rectangular, Luminous Intensity=250, Storage Location="PCB Assembly WS", Supplier="ECE Dept", Supplier 1=Farnell, Viewing Angle=140°, Wavelength Typ=625
DL2: library part DL_150060GS75000, "LED Green 430mcd 0603 SMD", Forward Current If=30, Forward Voltage=3.2, Manufacturer="WURTH ELEKTRONIK", Manufacturer Part Number=150060GS75000, Supplier Part Number 1=2322070, LED Colour=Green, LED Mounting=SMD, Lens Shape=Rectangular, Luminous Intensity=430, Storage Location="PCB Assembly WS", Supplier="ECE Dept", Supplier 1=Farnell, Viewing Angle=140°, Wavelength Typ=520
F1: library part FS_Fuse_2.0A, "Fuse 2.0A Very Fast Acting 1206 SMD", Manufacturer=MULTICOMP, Manufacturer Part Number="MC12CF 002", Supplier Part Number 1=1841029, Manufacturer PN="MC12CF 002", Storage Location="PCB Assembly WS", Supplier="ECE Dept", Supplier 1=Farnell
H3: library part LED_Strip_Header, "CONN HEADER 3POS 2.54mm VERT_Thru Hole", Manufacturer=Molex, Manufacturer PN=22-23-2031, Supplier Part Number 1=9731156, Storage Location="ECE Dept Store", Supplier="ECE Dept", Supplier 1=Farnell
H4: library part Battery_HEADER_3pin, "3Pin Header 2.54mm spacing / Digikey #WM22663-ND", Supplier Part Number 1=WM22663-ND, Supplier 1=Digi-Key
H_Bridge: "Dual H-Bridge Motor Driver 1.5A"
L1 L3: library part IN_Ferrite-Bead, "Ferrite Bead, Rdc 0.3R, Z100MHZ 600R, Imax 1A, SMD 1206", DC Current Rating=1, DC Resistance Max=0.08, Ferrite Case Style="1206 ^3216 Metric]", Frequency Range="50MHz to 1", Impedance Tolerance="± 25%", Manufacturer=FAIR-RITE, Manufacturer Part Number=2512066017Y1, Supplier Part Number 1=1612060, Ferrite Mounting=SMD, Impedance=600, Manufacturer PN=2512066017Y1, Storage Location="PCB Assembly WS", Supplier="ECE Dept", Supplier 1=Farnell
L2: library part CDRH104RNP-5R2NC, "FIXED IND 5.2UH 6A 22 MOHM SMD", Current - Saturation=5.6A, DC Resistance (DCR)="22 mOhm Max", Frequency - Self Resonant=-, Manufacturer="Sumida America Components Inc.", Operating Temperature="-40°C ~ 100°C", Package / Case=Nonstandard, Supplier Part Number 1=308-2280-1-ND, Tolerance=±30%, Category="Inductors, Coils, Chokes", ComponentLink1Description=http://products.sumida.com/products/pdf/CDRH104R.pdf, ComponentLink1URL=http://products.sumida.com/products/pdf/CDRH104R.pdf, Height - Seated (Max)="0.157\" (4.00mm)", Manufacturer Part Number=CDRH104RNP-5R2NC, Material - Core=Ferrite, Mounting Type="Surface Mount", Packaging="Cut Tape (CT)", Part Status=Active, Pricing 1="1=2.9, 10=2.678, 100=1.8743, 500=1.5173 (NZD)", Q @ Freq=-, Ratings=-, RoHS="RoHS Compliant", Shielding=Shielded, Size / Dimension="0.402\" L x 0.394\" W (10.20mm x 10.00mm)", Stock 1=3849, Supplier 1=Digi-Key, Supplier Device Package=-, Type=-
"MOTOR_A (+  -)" "MOTOR_B (-  +)": "2 Position Terminal Block 7.62mm spacing"
Q1: library part TM_SSM3J328R, "MOSFET P-CH 20V 6A SOT23-3", Case/Package=SOT-23-3, Continuous Drain Current (ID)=6A, Drain to Source Breakdown Voltage=-20V, Drain to Source Resistance=47.4mR, Drain to Source Voltage (Vdss)=20V, Gate to Source Voltage (Vgs)=8V, Input Capacitance=840pF, Input Capacitance (Ciss) @ Vds="840pF @ 10V", Manufacturer=Toshiba, Max Operating Temperature=150°C, Max Power Dissipation=1W, Min Operating Temperature=-55°C, Package / Case="SOT-23-3 Flat Leads", Package Quantity=3000, Power Dissipation=2W, Supplier Device Package=SOT-23F, Supplier Part Number=SSM3J328RLFDKR-ND, ComponentLink1Description=https://datasheet.ciiva.com/11158/ssm3j328r-datasheet-en-20140301-11158652.pdf, ComponentLink1URL=https://datasheet.ciiva.com/11158/ssm3j328r-datasheet-en-20140301-11158652.pdf, Current - Continuous Drain (Id) @ 25° C=6A, Element Configuration=Single, FET Feature="Logic Level Gate, 1.5V Drive", FET Type="MOSFET P-Channel, Metal Oxide", Gate Charge (Qg) @ Vgs="12.8nC @ 4.5V", Manufacturer Part Number=SSM3J328R,LF, Mount="Surface Mount", Number of Channels=1, Number of Elements=1, Number of Pins=3, Packaging="Tape and Reel", Power - Max=1W, Pricing="1=0.79, 10=0.658, 25=0.5772, 100=0.4939, 250=0.42836, 500=0.36284, 1000=0.27972 (NZD)", Radiation Hardening=No, Rds On Max=29.8mR, Storage Location="PCB Assembly WS", Supplier=Digi-Key, Supplier 1=Digi-Key, Supplier Part Number 1=SSM3J328RLFDKR-ND, Turn-Off Delay Time=107ns, Turn-On Delay Time=32ns, Vgs(th) (Max) @ Id="1V @ 1mA"
R1: library part RS_27K, "RES 27K OHM 1/10W 5% 0603 SMD", Storage Location="PCB Assembly WS", Supplier="ECE Dept"
R2 R9: library part RS_47K, "RES 47.0K OHM 1/10W 5% 0603 SMD", Storage Location="PCB Assembly WS", Supplier="ECE Dept"
R3 R4: library part RS_27R, "RES 27 OHM 1/10W 5% 0603 SMD", Storage Location="PCB Assembly WS", Supplier="ECE Dept"
R5: library part RT_1R, "RES 1R OHM 1/4W 5% 1206 SMD", Storage Location="PCB Assembly WS", Supplier="ECE Dept"
R6: library part RS_3K, "RES 3K OHM 1/10W 5% 0603 SMD", Storage Location="PCB Assembly WS", Supplier="ECE Dept"
R7: library part RS_2K, "RES 2K OHM 1/10W 5% 0603 SMD", Storage Location="PCB Assembly WS", Supplier="ECE Dept"
R8: library part RS_62K, "RES 62.0K OHM 1/10W 5% 0603 SMD", Storage Location="PCB Assembly WS", Supplier="ECE Dept"
R10 R11 R12 R14 R15 R16 R17: library part RS_0R0, "RES 0.0 OHM 1/10W 5% 0603 SMD", Storage Location="PCB Assembly WS", Supplier="ECE Dept"
R13: library part RS_1K, "RES 1.0K OHM 1/10W 5% 0603 SMD", Storage Location="PCB Assembly WS", Supplier="ECE Dept"
R18 R19: library part RS_25mR, "0.5W 1206 25mR Resistor", Power=0.5W
RESET SLEEP: library part WS_EVQPNF05M, "Panasonic 6 x 3.5mm SMD Light Touch Switch Type SMD", Manufacturer=Panasonic, Supplier Part Number 1=2079481, Manufacturer PN=EVQPNF05M, PackageDescription="6.0 x 3.5 mm", Storage Location="PCB Assembly WS", Supplier="ECE Dept", Supplier 1=Farnell, Supplier 2=Digi-Key, Supplier Part Number 2=P13598SCT-ND
SWD: library part JA_HDR_IDC_5X2_VERT, "IDC Header, 2,54mm, 10-Pin, Vert", Supplier Part Number 1=1096985, Storage Location="ECE Dept Store", Supplier="ECE Dept", Supplier 1=Farnell
TP1 TP2 TP3 TP4 TP5 TP6 TP7 TP8 TP9 TP11 TP12 TP13 TP14 TP15 TP16 TP17 TP18 TP19 TP20 TP21 TP22 TP23 TP24 TP25 TP26 TP27 TP28 TP29 TP30 TP31 TP32 TP33 TP34 TP35 TP36 TP37 TP38 TP39 TP40 TP41 TP42 TP43 TP44 TP45 TP46 TP47 TP48 TP49 TP50 TP51: library part TP_1206, "Test-Point 3.3x1.6x2.1mm SMD", Manufacturer="Harwin Inc", Manufacturer Part Number=S1751-46R, Supplier Part Number 1=952-1478-2-ND, Mounting Type="Surface Mount", Storage Location=ProtoPlace, Supplier="ECE Dept", Supplier 1=Digi-Key, Supplier 2=Farnell, Supplier Part Number 2=1826282, Type="PC Test Point"
U2: library part SE_ATSAM4S16BA-MU, "IC MCU 32BIT 512KB FLASH 64LQFP", Manufacturer=Atmel, Package / Case=64-LQFP, Supplier Part Number 1=ATSAM4S8BA-ANRCT-ND, Voltage - Supply (Vcc/Vdd)="1.62 V ~ 3.6 V", Code_JEDEC=MO-220VMMD-3, ComponentLink1Description="Manufacturer URL", ComponentLink1URL=http://www.atmel.com/, ComponentLink2Description="SAM4S Series Datasheet", ComponentLink2URL=http://www.atmel.com/dyn/resources/prod_documents/11100.pdf, ComponentLink3Description="SAM4S Series Summary", ComponentLink3URL=http://www.atmel.com/dyn/resources/prod_documents/11100S.pdf, Connectivity="I²C, IrDA, Memory Card, SPI, SSC, UART/USART, USB", Core Processor="ARM® Cortex®-M4", Core Size=32-Bit, Data Converters="A/D 11x12b, D/A 2x12b", Manufacturer Part Number=ATSAM4S8BA-ANR, Number of I/O=47, PackageDescription="64-Pin Quad Flat No-Lead (QFN) Sawn, 9 x 9 x 1.0 mm Body, 0.5 mm Pitch, Exposed Pad", PackageReference=64PS, PackageVersion="revJ, Jul-2007", Packaging="Cut Tape (CT)", Peripherals="Brown-out Detect/Reset, DMA, POR, PWM, WDT", Program Memory Size="512KB (512K x 8)", Program Memory Type=FLASH, RAM Size="128K x 8", Speed=120MHz, Supplier 1=Digi-Key
U3: library part NRF24, "nRF24 SMD Module", Warning="No power planes near or under device"
U5: "1.8V - 5V level converter"
USB: library part JS_USB_MICRO_B_SMT, "CONN USB MICRO B RECPT SMT R/A", Manufacturer=FCI, Manufacturer Part Number=10118194-0001LF, Supplier Part Number 1=609-4618-1-ND, Features="Shielded, Solder Retention", Gender=Receptacle, Mounting Type="Surface Mount, Right Angle, Horizontal", Number of Contacts=5, Specifications="USB 2.0", Supplier 1=Digi-Key
Y1: library part XT_CRYSTAL_12MHz_18pF, "CRYSTAL 12MHZ 18PF 6X3.5mm SMD", ESR (Equivalent Series Resistance)="60 Ohm", Frequency Stability=±50ppm, Frequency Tolerance=±30ppm, Load Capacitance=18pF, Manufacturer="CTS-Frequency Controls", Manufacturer Part Number=406C35D12M00000, Operating Mode=Fundamental, Operating Temperature="-20°C ~ 70°C", Package / Case="4-SMD, No Lead (DFN, LCC)", Supplier Part Number 1=CTX855CT-ND, Frequency=12MHz, Height="0.047\" (1.20mm)", Mounting Type="Surface Mount", Size / Dimension="0.236\" L x 0.138\" W (6.00mm x 3.50mm)", Supplier 1=Digi-Key

## Via types
v1: diameter 1, hole 0.5, Top Layer to Bottom Layer, 31 vias
v2: diameter 1.27, hole 0.711, Top Layer to Bottom Layer, 15 vias
v3: diameter 2.2, hole 1.6, Top Layer to Bottom Layer, 1 vias
v4: diameter 2, hole 1.5, Top Layer to Bottom Layer, 1 vias

## Nets (pads, with @x,y where several pads share a name; then routed paths per layer and width w, separated by ;. In a path a pad name is that pad's centre, name@x,y a point inside that pad or via, vN(x,y) a via of type N, cw(c..) or ccw(c..) an arc to the next point about the centre after c; other vN are vias at no path point)
3V3: 3V3_REGULATOR.5 C2.2 EXTRNL_HEAD1.1 R10.2 R11.2 R16.2 SWD.7 SWD.8 TP3.1 TP7.1 | length 15
  Top Layer w0.3: R10.2 1.9,59.162 v2(1.905,59.157) ; v2(5.69,41.453) 5.7,41.442 R16.2 ; v2(9.931,47.6) TP7.1 ; v1(11.7,43.3) C2.2 13.8,43.4 13.8,44.5 14.35,45.05 3V3_REGULATOR.5 ; EXTRNL_HEAD1.1 EXTRNL_HEAD1.1@21.336,43.053 ; R11.2 35.178,50.722 35.178,48.795 v2(35.484,48.489) ; TP3.1 v2(49.556,53.035)
5V: 5V_REGULATOR.5 C22.2 C23.2 EXTRNL_HEAD1.3 H3.1 L2.2 R14.1 R15.1 TP22.1 | length 36.7
  Top Layer w0.3: H3.1 2.184,47.584 2.184,39.04 4.321,36.903 6.911,36.903 7,36.993 R15.1 ; L2.2 13.005,27.762 14.529,27.762 14.886,27.405 5V_REGULATOR.5@16.639,27.405 ; 5V_REGULATOR.5 5V_REGULATOR.5@16.639,27.405 ; R14.1 19.05,37.15 v2(19.05,37.109) 19.823,37.882 21.245,37.882 EXTRNL_HEAD1.3 EXTRNL_HEAD1.3@21.12,38.087 ; TP22.1 18.771,29.693 17.501,29.693 16.789,28.981 v2(16.535,28.981) 16.535,27.509 5V_REGULATOR.5@16.639,27.405 ; v2(19.507,16.383) 19.693,16.569 19.693,17.337 20.6,18.244 C23.2
  other v2: 7.036,36.957
BAT_LEVEL: R8.1 R9.2 TP14.1 U2.9 | length 48.3
  Top Layer w0.3: R8.1 28.245,21.742 TP14.1 ; v1(28.423,23.8) 28.423,22.479 28.219,22.276 TP14.1 ; R9.2 29.413,21.438 28.854,21.996 TP14.1 ; v1(31.191,63.297) 31.191,63.486 31.75,64.045 U2.9
  Bottom Layer w0.3: v1(28.423,23.8) 28.335,23.888 28.335,54.598 31.191,57.455 v1(31.191,63.297)
D_N: R4.1 TP27.1 USB.2 | length 19.2
  Top Layer w0.381: R4.1 42.003,58.979 42.385,59.361 54.789,59.361 ; TP27.1 54.789,59.361 ; USB.2 54.789,59.361
D_P: R3.1 TP28.1 USB.3 | length 19.1
  Top Layer w0.381: R3.1 41.378,60.18 41.538,60.02 54.737,60.02 ; TP28.1 54.737,60.02 ; USB.3 58.343,60.011 58.334,60.02 54.737,60.02
ERROR_LED: R6.1 TP39.1 U2.5 | length 9.7
  Top Layer w0.3: U2.5 33.775,65.55 33.775,66.623 34.493,67.341 34.493,68.996 35.445,69.948 35.445,71.868 36.195,72.619 R6.1@36.195,74.155 ; R6.1@36.17,74.105 R6.1@36.195,74.08
EXT0: EXTRNL_HEAD1.2 TP44.1 U2.32 | length 24.4
  Top Layer w0.3: EXTRNL_HEAD1.2 23.724,40.462 TP44.1@23.749,40.437 ; U2.32 27.561,56.25 28.308,56.998 v1(28.55,56.998)
  Bottom Layer w0.3: EXTRNL_HEAD1.2 24.665,43.842 24.665,53.113 v1(28.55,56.998)
EXT1: <XTRNL_HEAD2.1 TP45.1 U2.3 | length 23.1
  Top Layer w0.3: v1(31.651,79.17) 32.563,80.082 32.563,81.204 TP45.1@32.563,83.312 ; v1(34.29,63.703) 34.75,64.163 U2.3
  Bottom Layer w0.3: v1(31.651,79.17) 31.651,67.059 34.29,64.42 v1(34.29,63.703)
EXT2: <XTRNL_HEAD2.2 TP46.1 U2.11 | length 19.7
  Top Layer w0.3: U2.11 30.75,66.773 31.725,67.748 31.725,78.041 35.205,81.522 TP46.1@35.205,83.39
EXT3: <XTRNL_HEAD2.3 TP47.1 U2.10 | length 21.9
  Top Layer w0.3: U2.10 31.25,66.56 32.225,67.535 32.225,77.792 33.985,79.553 35.763,79.553 37.643,81.432 37.796,81.586 TP47.1@37.796,83.287 ; TP47.1@37.694,83.287 TP47.1@37.744,83.337 ; TP47.1@37.796,83.185 TP47.1@37.796,83.465
EXT4: <XTRNL_HEAD2.4 TP48.1 U2.63 | length 22.9
  Top Layer w0.3: U2.63 36.496,63.25 36.192,63.554 36.192,63.802 37.414,65.024 37.414,71.755 40.183,74.524 40.183,81.204 40.31,81.331 TP48.1@40.31,83.287
GND: 3V3_REGULATOR.2 5V_REGULATOR.6 5V_REGULATOR.7 5V_REGULATOR.EPAD BUMPER.1 C1.1 C2.1 C3.1 C4.1 C5.1 C6.1 C7.1 C8.1 C9.1 C10.1 C11.1 C12.1 C13.1 C15.2 C17.1 C18.1 C19.1 C20.1 C21.1 C22.1 C23.1 C24.1 C26.2 CHANNEL_SELECTION.1 CHANNEL_SELECTION.2 CHANNEL_SELECTION.3 CHANNEL_SELECTION.4 D2.1 DL1.1 DL2.1 EXTRNL_HEAD1.4 H3.3 H4.1 H4.3 H_Bridge.13 H_Bridge.17 R2.1 R5.1 R9.1 R13.1 R18.2 R19.2 RESET.1 SLEEP.1 SWD.5 SWD.6 TP49.1 TP50.1 TP51.1 U2.2 U2.17 U2.46 U2.60 U3.2 U5.2 U5.5 USB.5 USB.6 | length 27.1
  Top Layer w0.3: U3.2 3.7,66.907 C18.1 ; C2.1 C2.1@14.05,41.35 ; v1(19.685,60.122) 19.874,60.122 20.255,59.741 C10.1 ; v2(30.074,71.704) 30.253,71.525 30.253,70.619 C6.1 ; U2.46 34.75,53.185 35.106,52.829 C9.1@35.106,52.073 ; C9.1 35.289,51.858 35.828,51.858 36.294,51.393 36.294,51.203 ; U2.2 35.25,66.681 35.116,66.816 35.116,67.961 C13.1 ; v2(35.408,62.179) 35.837,61.75 U2.60 38.964,61.75 39.432,62.217 40.577,62.217 C11.1 ; v1(39.827,29.108) 40.476,29.108 40.829,28.756 C26.2 ; C12.1 41.874,55.713 41.949,55.713 42.543,55.118 v1(42.697,55.118) ; v2(43.028,64.694) 43.645,64.694 44.233,65.281 C4.1
  other v3: 40.97,21.793
  other v4: 19,25.5
HB_AIN1: H_Bridge.16 TP29.1 U2.33 | length 37.5
  Top Layer w0.3: U2.33 28.25,37.35 37.639,27.961 ; TP29.1 35.531,27.961 37.639,27.961 ; H_Bridge.16 37.639,27.961
HB_AIN2: H_Bridge.15 TP30.1 U2.44 | length 35.7
  Top Layer w0.3: U2.44 33.75,53.406 32.956,52.611 32.956,34.445 37.942,29.459 ; TP30.1 37.948,29.464 37.942,29.459 ; H_Bridge.15 41.65,25.751 37.942,29.459
HB_BIN1: H_Bridge.9 TP32.1 U2.28 | length 50.5
  Top Layer w0.3: U2.28 33.554,58.25 38.368,53.436 38.368,44.439 47.207,35.599 ; TP32.1 47.246,35.56 48.077,34.729 48.077,27.127 H_Bridge.9
HB_BIN2: H_Bridge.10 TP33.1 U2.48 | length 38.5
  Top Layer w0.3: U2.48 35.75,53.44 37.868,51.322 37.868,38.256 41.465,34.658 ; TP33.1 39.154,34.658 41.465,34.658 ; H_Bridge.10 44.9,25.662 45.512,26.275 46.06,26.275 47.422,27.636 47.422,28.702 41.465,34.658
LED_DATA_3V3: TP25.1 U2.34 U5.4 | length 38.4
  Top Layer w0.3: U5.4 4.464,46.831 TP25.1 4.902,47.269 4.902,48.156 5.575,48.83 5.575,50.77 5.181,51.165 3.913,51.165 2.946,52.132 2.946,52.908 3.554,53.515 19.961,53.515 20.802,54.356 22.974,54.356 24.218,55.6 24.243,55.575 27.686,55.575 27.889,55.778 28.473,55.778 28.75,55.502 U2.34
LED_DATA_5V: H3.2 TP26.1 TP43.1 U5.3 | length 13.1
  Top Layer w0.3: H3.2 8.21,52.34 8.55,52 TP43.1 9.3,49.229 TP26.1 6.864,46.793 U5.3
nBUMPER: BUMPER.2 TP21.1 U2.29 | length 15.3
  Top Layer w0.3: TP21.1 13.792,56.54 BUMPER.2 14.808,57.556 19.894,57.556 20.414,58.076 24.956,58.076 25.283,57.75 U2.29
nCH0: P3.1 TP11.1 U2.16 | length 16.2
  Top Layer w0.3: P3.1 TP11.1 21.844,71.931 U2.16
nCH1: P3.2 TP12.1 U2.15 | length 15.3
  Top Layer w0.3: P3.2 24.384,76.86 TP12.1 24.409,70.917 28.75,66.576 U2.15
nCH2: P3.3 TP37.1 U2.14 | length 15.4
  Top Layer w0.3: TP37.1 26.924,76.911 P3.3 ; 27,77.826 27,77.419 27,69.063 29.25,66.813 U2.14
nCH3: P3.4 TP38.1 U2.13 | length 14.2
  Top Layer w0.3: P3.4 29.566,78.943 TP38.1 29.566,75.844 28.847,75.126 28.847,68.049 29.75,67.147 U2.13
NetC1_2: 3V3_REGULATOR.1 3V3_REGULATOR.3 C1.2 R14.2 | length 5
  Top Layer w0.3: 15.7,41.8 16.275,41.225 C1.2 R14.2 17.6,41.8
NetC3_2: C3.2 U2.62 Y1.3 | length 19
  Top Layer w0.3: U2.62 38.125,62.75 38.15,62.775 38.575,62.775 39.087,63.286 39.256,63.286 39.901,63.932 v1(39.954,63.932) ; v1(44.704,55.626) 46.379,55.626 ; Y1.3@47.434,57.449 46.379,56.394 46.379,55.626 ; C3.2 48.079,55.601 48.054,55.626 46.379,55.626
  Bottom Layer w0.3: v1(39.954,63.932) 44.704,59.182 v1(44.704,55.626)
NetC4_2: C4.2 U2.61 Y1.1 | length 9.8
  Top Layer w0.3: U2.61 38.757,62.25 39.225,62.717 43.579,62.717 44.046,62.25 44.722,62.25 Y1.1@44.933,62.04 ; C4.2 Y1.1@44.933,62.04 ; Y1.1 Y1.1@44.933,62.04
NetC5_2: C5.2 C7.2 C9.2 C11.2 C13.2 R11.1 U2.1 U2.7 U2.18 U2.45 U2.58 | length 30
  Top Layer w0.3: C7.2 24.586,63.25 U2.18 27.792,63.25 28.143,63.602 v1(28.702,63.602) ; C5.2 32.75,67.65 U2.7 32.75,64.139 33.071,63.819 v1(33.071,63.119) ; R11.1@33.683,50.803 33.706,50.825 33.706,52.654 34.25,53.198 U2.45 34.25,56.196 v1(34.29,56.236) ; C13.2 35.75,67.195 U2.1 35.75,64.35 35.527,64.127 35.527,63.681 35.029,63.183 35.019,63.183 33.68,61.845 v1(33.68,61.29) 33.87,61.29 34.41,60.75 U2.58 38.609,60.75 39.109,61.25 39.809,61.25 C11.2
NetC6_2: C6.2 C8.2 C10.2 C12.2 L1.2 TP2.1 U2.8 U2.12 U2.24 U2.54 | length 38.5
  Top Layer w0.3: C10.2 23.208,59.741 23.717,60.25 U2.24 27.753,60.25 27.791,60.212 29.274,60.212 29.313,60.25 ; C8.2 29.659,68.605 C6.2@30.709,68.605 ; C6.2 C6.2@30.709,68.605 ; U2.8 32.25,63.5 32.221,63.471 32.221,63.124 30.284,61.187 30.25,61.187 ; TP2.1 43.002,58.036 42.827,57.861 39.7,57.861 38.811,58.75 U2.54 30.813,58.75 29.313,60.25 ; 29.313,60.25 30.25,61.187 ; 30.25,61.187 30.263,61.2 30.263,62.963 30.25,62.976 U2.12 30.25,67.08 30.709,67.539 C6.2@30.709,68.605
NetC14_1: C14.1 R5.2 | length 2.4
  Top Layer w0.3: C14.1 38.684,70.46 R5.2
NetC14_2: C14.2 C15.1 L1.1 TP5.1 U2.64 | length 19.7
  Top Layer w0.3: U2.64 38.125,63.75 38.506,64.131 38.506,64.16 38.684,64.338 C14.2 38.786,66.421 C15.1 40.081,66.396 TP5.1 45.517,66.396 46.228,65.684 46.228,60.985 45.919,60.676 43.362,60.676 L1.1
NetC16_1: 5V_REGULATOR.8 C16.1 D2.2 L2.1 | length 22
  Top Layer w0.3: L2.1 7.972,23.595 14.302,23.595 ; D2.2 12.843,22.136 14.302,23.595 ; C16.1 16.805,23.595 5V_REGULATOR.8 14.302,23.595
NetC16_2: 5V_REGULATOR.1 C16.2 | length 2.2
  Top Layer w0.3: C16.2 19.8,22.084 5V_REGULATOR.1
NetC17_2: C17.2 F1.1 H4.2 TP13.1 | length 12.7
  Top Layer w0.3: F1.1 21.6,12.405 TP13.1
  Top Layer w0.9: H4.2@13.8,5.66 17.86,5.66 19.4,7.2 19.4,7.7 19.95,8.25 20.45,8.25 21.6,9.4 F1.1
NetC18_2: C18.2 L3.1 U3.1 | length 4.6
  Top Layer w0.9: L3.1 2.05,62.55 2.05,64.45 C18.2 2.1,64.6 2.386,64.886 U3.1
NetC19_2: C19.2 R15.2 U5.1 | length 4.6
  Top Layer w0.3: U5.1 6.864,42.36 7.163,42.061 7.163,41.243 6.864,40.944 6.864,40.236 R15.2 7.1,40 C19.2
NetC20_2: C20.2 R16.1 U5.6 | length 5.3
  Top Layer w0.3: U5.6 4.464,42.317 4.191,42.044 4.191,41.088 4.464,40.815 4.464,40.064 C20.2 5.6,38.8 5.6,38.6 R16.1
NetC24_2: C24.2 C25.2 H_Bridge.12 R17.1 | length 6.8
  Top Layer w0.3: H_Bridge.12 43.6,26.402 43,27.003 43,27.23 42.95,27.18 R17.1 43.942,28.372 C24.2 44.653,28.651 45.692,28.651 C25.2
NetC25_1: C25.1 H_Bridge.11 | length 3.5
  Top Layer w0.3: H_Bridge.11 44.25,25.81 C25.1
NetC26_1: C26.1 H_Bridge.14 | length 3.1
  Top Layer w0.3: C26.1 41.529,26.706 42.3,25.935 H_Bridge.14
NetDL1_2: DL1.2 R6.2 | length 1.1
  Top Layer w0.3: DL1.2@36.119,76.81 DL1.2@36.144,76.784 ; R6.2@36.195,75.617 DL1.2@36.195,76.708
NetDL2_2: DL2.2 R7.2 | length 0.9
  Top Layer w0.3: DL2.2@34.493,76.733 DL2.2@34.544,76.683 ; R7.2@34.62,75.819 DL2.2@34.62,76.632
NetF1_2: F1.2 Q1.3 | length 3.5
  Top Layer w0.9: F1.2 24.5,6.183 Q1.3
NetH8_1: "MOTOR_A (+  -).1" H_Bridge.4 TP41.1 | length 17.4
  Top Layer w0.3: TP41.1@38.887,11.887 42.493,11.887 42.95,12.344 ; H_Bridge.4 42.95,12.344 ; 43.5,6.1 43.5,8.974 42.95,9.524 42.95,12.344
NetH8_2: "MOTOR_A (+  -).2" H_Bridge.2 TP31.1 | length 17.8
  Top Layer w0.3: TP31.1 34.275,13.503 35.88,13.503 ; 35.88,6.1 35.88,13.503 ; H_Bridge.2 41.65,17.885 40.758,16.993 39.37,16.993 35.88,13.503
NetH9_1: "MOTOR_B (-  +).1" H_Bridge.7 TP34.1 | length 24.6
  Top Layer w0.3: H_Bridge.7 44.9,17.762 45.568,17.094 50.343,17.094 54.423,13.014 ; TP34.1 54.44,13.03 54.423,13.014 ; 59.436,5.512 58.919,6.028 58.919,8.518 54.423,13.014
NetH9_2: "MOTOR_B (-  +).2" H_Bridge.5 TP42.1 | length 20.4
  Top Layer w0.3: H_Bridge.5 43.6,15.176 44.501,14.275 46.414,14.275 47.557,13.132 ; TP42.1 47.557,13.132 ; 51.816,5.512 51.816,8.873 47.557,13.132
NetL3_2: L3.2 R10.1 | length 2.5
  Top Layer w0.9: R10.1 3.7,60.8 5,62.1 L3.2
NetQ1_1: Q1.1 R13.2 | length 1.9
  Top Layer w0.3: R13.2 26.562,3.295 Q1.1
NetR3_2: R3.2 U2.57 | length 2.4
  Top Layer w0.3: U2.57 39.826,60.25 R3.2
NetR4_2: R4.2 U2.56 | length 2.7
  Top Layer w0.3: U2.56 38.548,59.75 39.319,58.979 R4.2
NetR12_2: 5V_REGULATOR.2 5V_REGULATOR.3 R12.2 | length 3.4
  Top Layer w0.3: 5V_REGULATOR.3 5V_REGULATOR.2 23.293,24.865 R12.2
NetR18_1: H_Bridge.3 R18.1 | length 3.6
  Top Layer w0.3: R18.1 41.453,15.977 41.453,16.866 42.3,17.713 H_Bridge.3
NetR19_1: H_Bridge.6 R19.1 | length 3.4
  Top Layer w0.3: H_Bridge.6 44.25,17.564 45.034,16.779 R19.1
NetTP4_1: TP4.1 U2.55 | length 17.1
  Top Layer w0.3: v1(35.179,59.715) 35.592,59.715 36.057,59.25 U2.55 ; v1(42.951,68.758) TP4.1
  Bottom Layer w0.3: v1(35.179,59.715) 38.303,62.84 38.303,64.465 40.383,66.545 40.738,66.545 v1(42.951,68.758)
nHB_FAULT: H_Bridge.8 TP36.1 U2.37 | length 44.7
  Top Layer w0.3: v1(30.226,51.638) 30.25,51.662 U2.37 ; H_Bridge.8 45.55,19.007 v1(46.558,20.015) 48.362,20.015 TP36.1
  Bottom Layer w0.3: v1(30.226,51.638) 46.558,35.306 v1(46.558,20.015)
nHB_SLEEP: H_Bridge.1 TP35.1 U2.36 | length 43.1
  Top Layer w0.3: v1(29.185,52.603) 29.75,53.169 U2.36 ; TP35.1 38.075,18.948 38.151,19.025 v1(39.903,19.025) 40.975,19.025 H_Bridge.1
  Bottom Layer w0.3: v1(29.185,52.603) 29.185,29.82 39.903,19.101 v1(39.903,19.025)
nRST: RESET.2 SWD.1 TP8.1 U2.39 | length 37.7
  Top Layer w0.3: U2.39 31.25,52.672 v1(31.979,51.943) ; TP8.1@45.745,42.113 RESET.2 48.819,42.139 v1(48.819,44.348)
  Bottom Layer w0.3: v1(31.979,51.943) 31.979,50.601 38.231,44.348 v1(48.819,44.348) 57.226,44.348 SWD.1
nSLEEP_BTN: SLEEP.2 TP9.1 U2.30 | length 6.3
  Top Layer w0.3: SLEEP.2@21.031,55.956 22.081,55.956 22.454,56.329 22.454,56.847 22.629,57.023 23.8,57.023 TP9.1 25.121,56.998 25.373,57.25 U2.30
RADIO_CE: TP19.1 U2.26 U3.3 | length 28.4
  Top Layer w0.3: U3.3 4.929,64.53 10.604,58.855 ; TP19.1 8.867,58.855 10.604,58.855 ; U2.26 25.44,59.25 25.044,58.855 10.604,58.855
RADIO_CSN: TP15.1 U2.20 U3.4 | length 30.8
  Top Layer w0.3: U3.4 6.2,65.45 6.833,64.817 v1(6.833,64.719) 6.833,64.541 TP15.1 ; U2.20 27.085,62.25 27.1,62.265 29.322,62.265 v1(29.337,62.281)
  Bottom Layer w0.3: v1(6.833,64.719) 26.244,64.719 28.212,62.752 28.677,62.752 29.148,62.281 v1(29.337,62.281)
RADIO_IRQ: TP20.1 U2.19 U3.8 | length 16.9
  Top Layer w0.3: U3.8 14.635,66.95 TP20.1 18.835,62.75 U2.19
RADIO_MISO: TP18.1 U2.27 U3.7 | length 26.3
  Top Layer w0.3: U3.7 10.014,65.45 11.126,64.338 ; TP18.1 11.126,64.338 ; v1(13.564,62.306) 13.158,62.306 11.126,64.338 ; U2.27 27.522,58.75 28.081,59.309 v1(28.27,59.309)
  Bottom Layer w0.3: v1(13.564,62.306) 16.598,59.272 28.233,59.272 v1(28.27,59.309)
RADIO_MOSI: TP17.1 U2.22 U3.6 | length 22
  Top Layer w0.3: U3.6 8.743,65.4 9.767,64.375 10.265,64.375 12.294,62.347 12.294,61.85 TP17.1 14.918,60.376 15.792,61.25 U2.22
RADIO_SCK: TP16.1 U2.21 U3.5 | length 27.8
  Top Layer w0.3: U3.5 7.471,65.45 8.367,64.555 8.75,64.555 v1(9.779,63.525) 9.913,63.391 9.913,62.833 TP16.1 ; U2.21 27.633,61.75 28.143,61.239 v1(28.372,61.239)
  Bottom Layer w0.3: v1@10.008,63.5 14.148,63.5 16.408,61.239 v1(28.372,61.239)
STATUS_LED: R7.1 TP40.1 U2.6 | length 9.8
  Top Layer w0.3: U2.6 33.25,66.805 33.828,67.383 33.828,69.038 34.595,69.805 34.595,72.136 TP40.1@34.595,72.542 ; TP40.1 34.569,72.542 34.569,74.219 R7.1@34.646,74.295
SWCLK: SWD.2 TP23.1 U2.53 | length 31.1
  Top Layer w0.3: U2.53 38.6,58.25 40.424,56.426 40.424,55.818 46.026,50.216 ; TP23.1 46.026,50.216 ; SWD.2 56.185,47.93 48.312,47.93 46.026,50.216
SWDIO: SWD.4 TP24.1 U2.51 | length 32.2
  Top Layer w0.3: U2.51 37.55,57.225 38.66,57.225 39.878,56.007 39.878,54.661 48.654,45.885 ; TP24.1 48.666,45.898 48.654,45.885 ; SWD.4 58.63,42.945 51.594,42.945 48.654,45.885
USB_DETECT: R1.1 R2.2 TP1.1 U2.35 | length 33.1
  Top Layer w0.3: U2.35 29.25,55.51 30.941,57.201 v1(32.537,57.201) ; v1(52.857,51.537) 53.019,51.537 53.605,52.123 R2.2 54.305,53.823 TP1.1 54.305,54.023 R1.1
  Bottom Layer w0.3: v1(32.537,57.201) 35.357,57.201 41.021,51.537 v1(52.857,51.537)
VBAT: Q1.2 R8.2 R12.1 R17.2 | length 7.7
  Top Layer w0.3: R12.1 23.471,23.292 v2(25.298,23.292) 27.002,23.292 R8.2 ; Q1.2 26.67,7.18 v2(26.67,8.915) ; v2(42.774,30.912) 42.774,28.856 R17.2
VBUS: R1.2 TP6.1 USB.1 | length 7.1
  Top Layer w0.3: TP6.1 56.155,54.077 55.805,54.427 R1.2 55.805,56.923 57.593,58.711 USB.1
pads on no net: 3V3_REGULATOR.4 5V_REGULATOR.4 C21.2 SWD.3 SWD.9 SWD.10 U2.4 U2.23 U2.25 U2.31 U2.38 U2.40 U2.41 U2.42 U2.43 U2.47 U2.49 U2.50 U2.52 U2.59 USB.4 Y1.2 Y1.4

## Polygon pours and split planes (outlines as drawn)
GND on Top Layer "Top Layer-GND" (solid, remove dead copper, pour order 6): -0.406,85.039 63.449,85.039 64.084,84.404 64.084,-0.127 0.61,-0.127 0.102,0.381
no net on Top Layer "Top Layer-No Net" (solid, pour order 0): 88.468,61.544
GND on Board Outline (solid, remove dead copper): -0.914,86.182 0.268,85 64,85 64,-0.211 63.779,-0.432 63.348,0 0,0
GND on Board Outline (solid, remove dead copper): -11.252,65.989
GND on Board Outline (solid, remove dead copper): -0.914,86.182 64.059,86.182 64.135,86.106 64,85.971 64,0 0,0
GND on Board Outline (solid, remove dead copper): -0.914,86.182 0.268,85 64,85 64,0 0,0
NetC5_2 on Power Plane (split plane): 36.269,64.361 36.269,55.705 36.243,55.679 27.511,55.679 27.434,55.756 27.434,64.488 36.141,64.488
VBAT on Power Plane (split plane): 46.759,29.558 46.759,0.51 23.65,0.51 23.65,27.102 23.65,28.039 27.193,31.582 27.943,32.332 43.985,32.332
5V on Power Plane (split plane): 21.562,36.091 21.562,16.97 19.784,15.192 0.51,15.192 0.51,39.241 18.412,39.241
3V3 on Power Plane (split plane): 63.49,0.51 47.018,0.51 47.018,29.612 47.008,29.661 46.98,29.703 44.13,32.553 44.088,32.581 44.039,32.591 27.889,32.591 27.84,32.581 27.798,32.553 27.01,31.765 23.429,28.184 23.401,28.142 23.391,28.092 23.391,27.168 23.388,27.164 23.378,27.114 23.388,27.065 23.391,27.061 23.391,0.51 0.51,0.51 0.51,14.933 19.837,14.933 19.887,14.943 19.929,14.971 21.783,16.825 21.811,16.867 21.821,16.916 21.821,36.144 21.811,36.194 21.783,36.236 18.557,39.462 18.515,39.49 18.466,39.499 0.51,39.499 0.51,68.58 16.967,68.58 16.987,68.6 17,68.6 20.1,71.7 20.1,84.49 63.49,84.49
GND on Ground Plane (split plane): 63.49,0.51 0.51,0.51 0.51,68.473 19.942,68.473 19.942,68.5 20.1,68.5 20.1,84.49 63.49,84.49

## Other copper
Top Layer:
  pour cut-out: -1.067,86.512 20.041,86.512 20.142,86.411 20.142,68.673 19.942,68.473 19.936,68.478 -0.991,68.478
  pour cut-out: -0.658,85.496 20.142,85.496 20.142,68.673 19.942,68.473 -0.758,68.473
  text "Group 25 Racer: / Brett Hockey / Alfie Mansfield" at 44.882,75.311 h0.8
Bottom Layer:
  pour cut-out: -1.397,86.385 -1.016,86.766 20.066,86.766 20.066,68.634 20.095,68.605 -1.575,68.605
  pour cut-out: -0.701,85.496 20.1,85.496 20.1,68.6 -0.8,68.6
Ground Plane (plane layer: these items are gaps in the copper):
  pour cut-out: 19.942,68.473 -1.442,68.473 -1.575,68.605 -1.448,68.732 -1.448,86.69 19.99,86.69 20.066,86.766
  pour cut-out: -0.6,85.6 20.1,85.6 20.1,68.5 -0.6,68.5 -0.8,68.7
Power Plane (plane layer: these items are gaps in the copper):
  pour cut-out: -1.219,86.512 -1.295,86.436 -1.295,68.58 16.967,68.58 20.087,71.7 20.1,71.7 20.1,86.496 20.193,86.589
  pour cut-out: -7,71.4
  pour cut-out: -0.5,85.5 20.1,85.5 20.1,71.7 17,68.6 -0.7,68.6
  region: -3.3,84.9
  region: -3.4,88.2